# Altium PCB Main Circuit PCB.PcbDoc
Units mil, origin at the board's own origin, x right, y up, seen from the top; angles counter-clockwise.
Board outline 2933.07 x 1692.91 mil, 2 copper layers (Top Layer, Bottom Layer); 31 components, 24 nets, 105 pads, 21 vias.
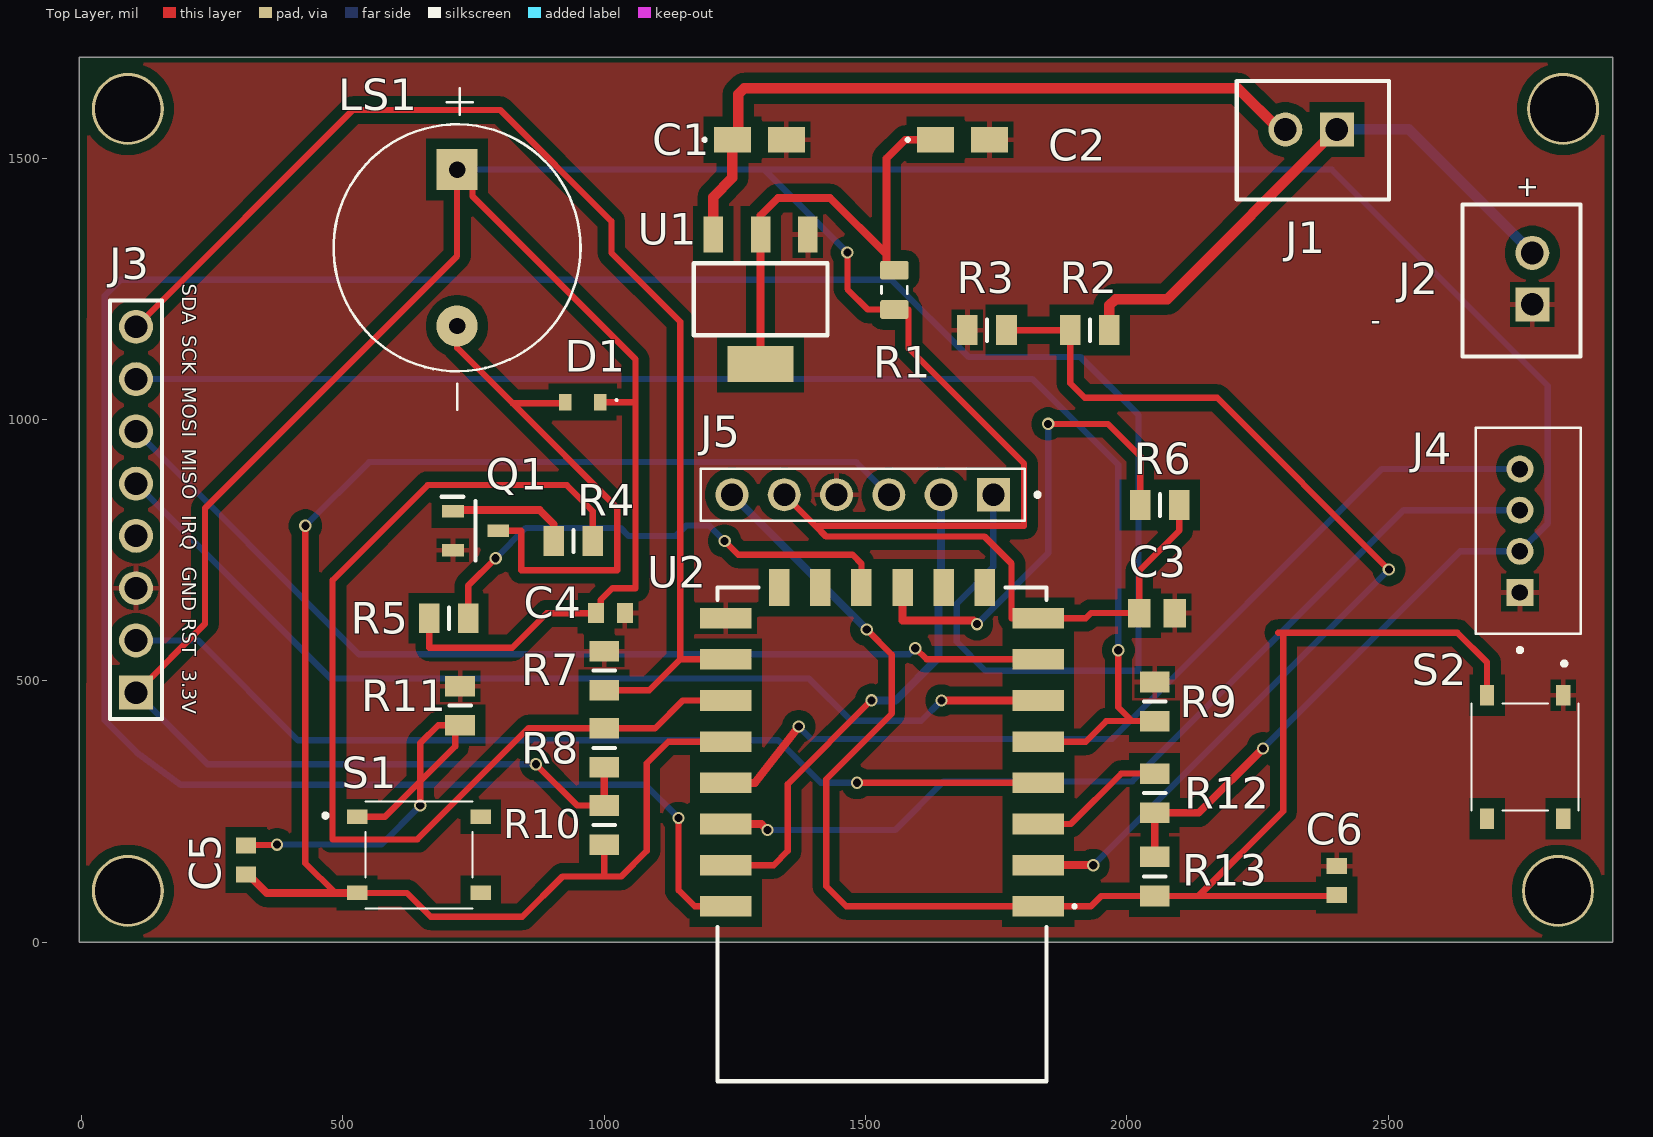
[diagram p0: Top Layer view]
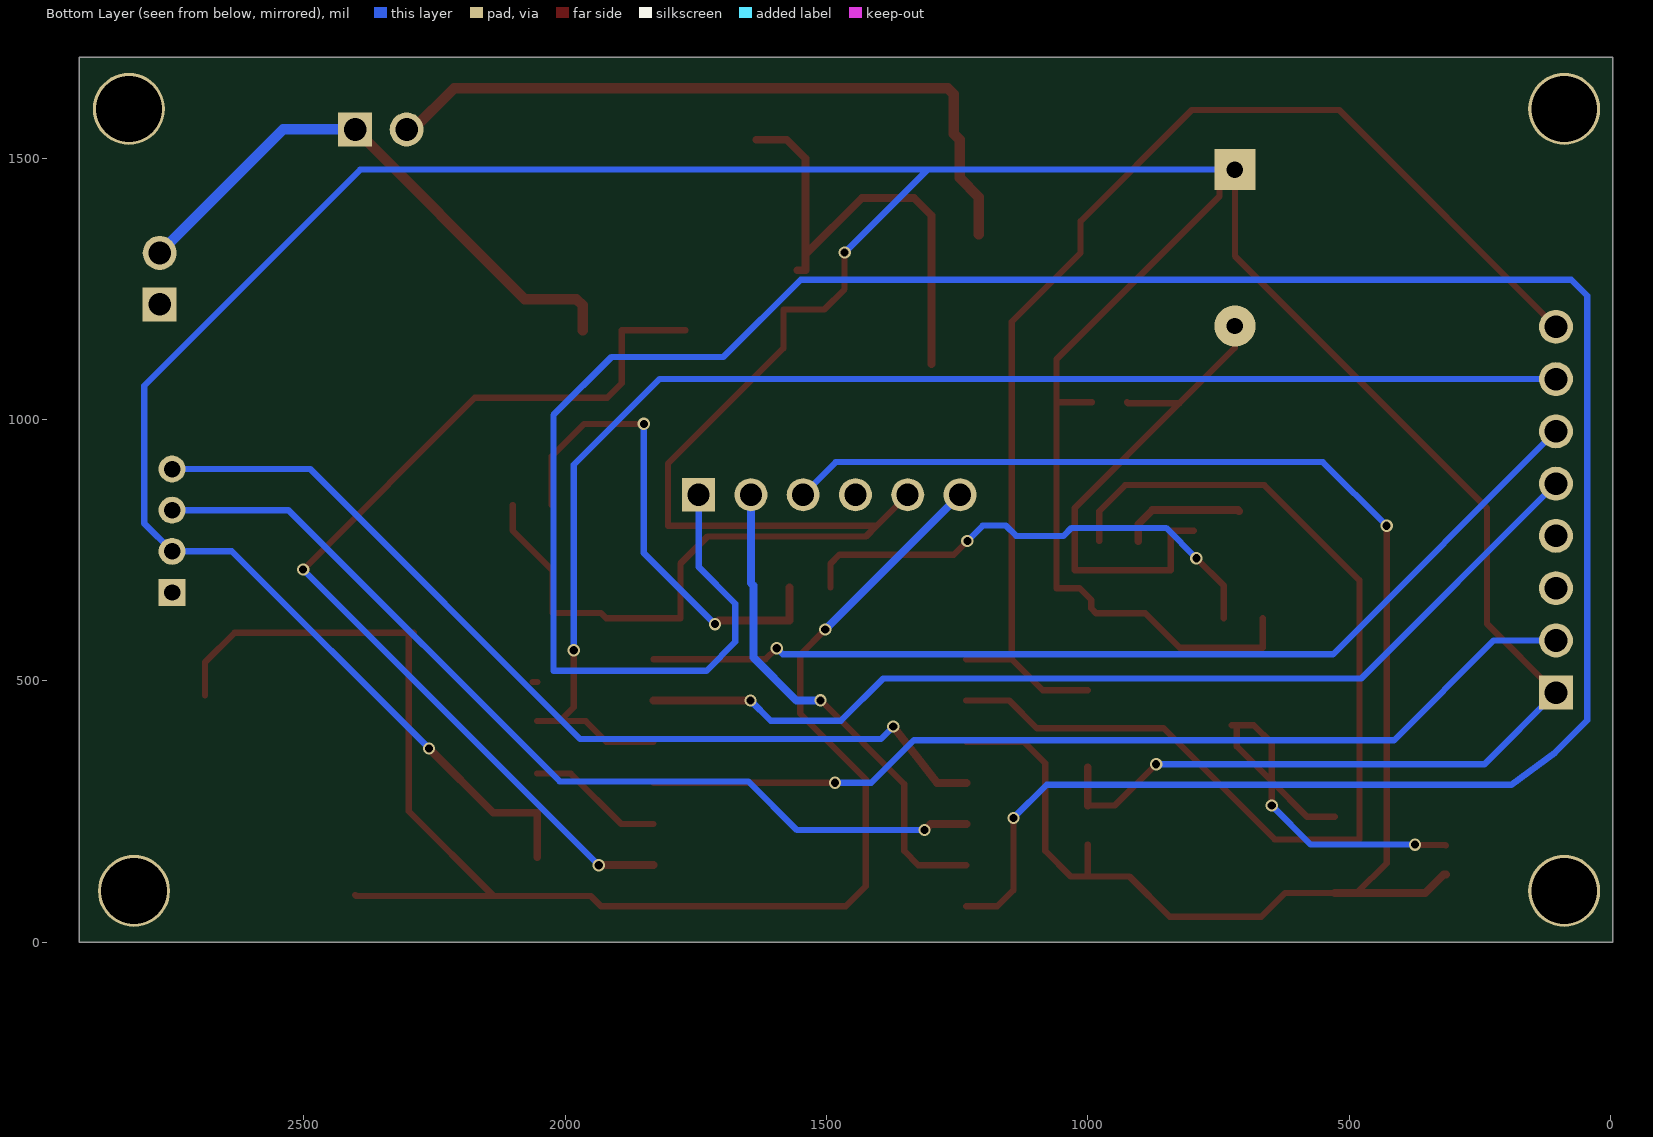
[diagram p1: Bottom Layer view, seen from below]
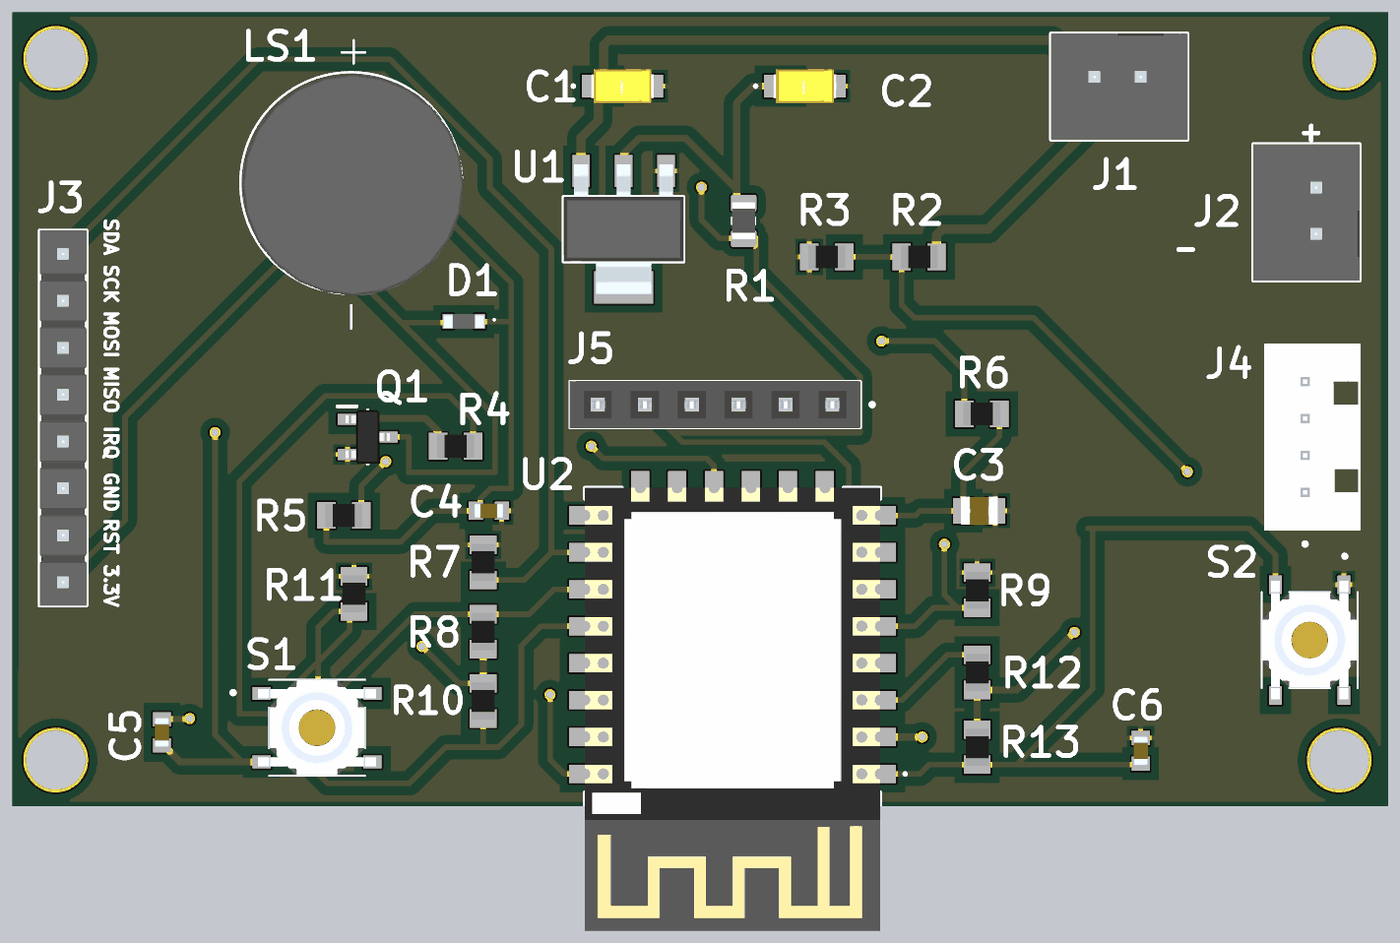
[diagram p2: 3D render of the assembled board from above, using the file's embedded part models]

## Layer stack, top to bottom
Top Solder: solder mask 0.4, Solder Resist, Dk 3.5
Top Layer: signal copper 1.4
Dielectric 1: dielectric 12.6, FR-4, Dk 4.8
Bottom Layer: signal copper 1.4
Bottom Solder: solder mask 0.4, Solder Resist, Dk 3.5

## Board outline
-3.94,1692.91 2929.13,1692.91 2929.13,0 -3.94,0

## Design rules (kind name [scope] priority, off if disabled: settings)
Clearance [All] p1: gap=19.68 ignorepadtopadclearanceinfootprint=FALSE except(12.69: SMDPad-SMDPad)
HoleSize [All] p1: absolutevalues=TRUE maxlimit=150 minlimit=1 maxpercent=80.000 minpercent=20.000
PolygonConnect [All] p1: connectstyle=Relief reliefconductorwidth=10 reliefentries=4 polygonreliefangle="90 Angle" airgapwidth=10
RoutingVias [All] p1: holewidth=15.75 width=23.62 viastyle="Through Hole" minholewidth=15.75 minwidth=23.62 maxholewidth=28 maxwidth=50
SolderMaskExpansion [All] p1: expansion=4 istentingtop=FALSE
Width [All] p1: maxlimit=30 minlimit=12 preferedwidth=15
29 further rules are at their usual default settings.

## Classes and differential pairs
component class Sheet1: C3 C4 C5 C6 D1 J1 J2 J3 J4 J5 LS1 Q1 R1 R2 R3 R4 R5 R6 R7 R8 R9 R10 R11 R12 R13 S1 S2 U1 U2

## Components (designator, comment, footprint, x,y, rotation, side; value= is the part's Value field where it differs from the comment)
C1 "10uF" T491A 1296.85,1535.43 r0 top
C2 "10uF" T491A 1685.43,1535.43 r0 top
C3 "10uF" 10UCER 2057.6,629.92 r0 top
C4 "0.1uF" 100n 1011.81,629.92 r180 top
C5 "0.1uF" 100n 314.96,157.48 r270 top
C6 "0.1uF" 100n 2401.57,118.11 r270 top
D1 "RB501SM0" Shottkey 958.66,1033.46 r270 top
J1 "POWER_SWITCH" 2jst 2401.57,1555.12 r180 top
J2 "BMS_IN" 2jst 2775.59,1220.47 r90 top
J3 "RFID_IN" 8x1 104.33,477.56 r90 top
J4 "OLED_OUT" 4x1 2751.97,787.4 r90 top
J5 "FLASH_IN" 6x1 1494.49,856.3 r180 top
LS1 "CMI-1295-0585T" BUZZER 718.5,1328.74 r270 top
Q1 "BC848B,215" BC8488 753.94,787.4 r0 top
R1 "0R" 0ohm 1555.12,1248.23 r270 top
R2 "100k" 100k 1929.13,1171.26 r0 top
R3 "100k" 100k 1732.28,1171.26 r0 top
R4 "330R" 330r 940.94,767.72 r0 top
R5 "10K" 10k 702.76,620.08 r0 top
R6 "10K" 10k 2062.99,836.61 r180 top
R7 "10K" 10k 1000,519.68 r270 top
R8 "10K" 10k 1000,372.05 r90 top
R9 "10K" 10k 2053.15,460.63 r270 top
R10 "10K" 10k 1000,224.41 r270 top
R11 "330R" 330r 724.41,452.76 r90 top
R12 "10K" 10k 2053.15,285.43 r90 top
R13 "10K" 10k 2053.15,125.98 r270 top
S1 "PTS526" SWITCH 645.67,167.32 r0 top
S2 "PTS526" SWITCH 2761.81,354.33 r270 top
U1 "TC1262-3.3VDBTR" 3v3 1299.21,1230.32 r270 top
U2 "ESP-12F" esp12f 1531.5,206.69 r180 top

## Footprints (in the part's own frame and the unit in brackets; to place one, negate y for a bottom-side part, rotate by r counter-clockwise, add the part's x,y. Pads: shape width x height; smd on the part's side, far side on the other; paste and mask are expansions set on the pad)
0ohm [mm]
  rrect25% 0.92x1.38 smd: 1(-0.955,0) 2(0.955,0)
  silkscreen extent -0.17,-0.63 0.18,0.62, body extent -1,-0.63 1,0.63, height 0.3
2jst [mm]
  rect 1.65x1.65 hole 1.1: 1(0,0)
  round 1.65 hole 1.1: 2(2.5,0)
  silkscreen extent -2.54,-2.35 4.86,3.4, body extent -2.54,-2.35 4.86,3.4, height 7
3v3 [mm]
  rect 1.75x0.95 smd: 1(-3.15,2.3) 2(-3.15,0) 3(-3.15,-2.3)
  rect 1.75x3.2 smd: 4(3.15,0)
  silkscreen extent -1.75,-3.25 1.75,3.25, body extent -3.5,-3.25 3.5,3.25, height 1.8
4x1 [mm]
  rect 1.308x1.308 hole 0.8: 1(-3,0)
  round 1.308 hole 0.8: 2(-1,0) 3(1,0) 4(3,0)
  silkscreen extent -5.9,-2.95 5,2.15, body extent -5,-2.95 5,2.15, height 9.1
6x1 [mm]
  rect 1.605x1.605 / inner round 1.605 / far side rect 1.605x1.605 hole 1.07: 1(-6.35,0)
  round 1.605 hole 1.07: 2(-3.81,0) 3(-1.27,0) 4(1.27,0) 5(3.81,0) 6(6.35,0)
  silkscreen extent -8.6,-1.27 7.87,1.27, body extent -7.87,-1.27 7.87,1.27, height 8.51
8x1 [mm]
  rect 1.65x1.65 hole 1.1: 1(0,0)
  round 1.65 hole 1.1: 2(2.54,0) 3(5.08,0) 4(7.62,0) 5(10.16,0) 6(12.7,0) 7(15.24,0) 8(17.78,0)
  silkscreen extent -1.27,-1.27 19.05,1.27, body extent -1.27,-1.27 19.05,1.27, height 8.54
10k [mm]
  rect 1x1.45 smd: 1(-0.95,0) 2(0.95,0)
  silkscreen extent 0,-0.53 0,0.52, body extent -1,-0.63 1,0.63, height 0.5
10UCER [mm]
  rect 1.1x1.38 smd: 1(-0.863,0) 2(0.863,0)
  body extent -1,-0.76 1,0.76, height 1.22
100k [mm]
  rect 1x1.45 smd: 1(-0.95,0) 2(0.95,0)
  silkscreen extent 0,-0.53 0,0.53, body extent -1,-0.63 1,0.63, height 0.5
100n [mm]
  rect 0.78x0.98 smd: 1(-0.7,0) 2(0.7,0)
  body extent -0.8,-0.4 0.8,0.4, height 0.95
330r [mm]
  rect 1x1.45 smd: 1(-0.95,0) 2(0.95,0)
  silkscreen extent 0,-0.53 0,0.52, body extent -1,-0.63 1,0.63, height 0.5
BC8488 [mm]
  rect 1.05x0.6 smd: 1(-1.1,0.95) 2(-1.1,-0.95) 3(1.1,0)
  silkscreen extent -1.65,-1.45 0,1.65, body extent -1.2,-1.45 1.2,1.45, height 0.95
BUZZER [mm]
  round 2 hole 0.8: N(3.8,0)
  rect 2x2 / inner round 2 / far side rect 2x2 hole 0.8: P(-3.8,0)
  silkscreen extent -7.75,-6 7.87,6, body extent -5.9,-5.9 6.1,6.08, height 10.2
esp12f [mm]
  rect 2.5x1 smd: 1(-7.6,3.5) 2(-7.6,1.5) 3(-7.6,-0.5) 4(-7.6,-2.5) 5(-7.6,-4.5) 6(-7.6,-6.5) 7(-7.6,-8.5) 8(-7.6,-10.5) 15(7.6,-10.5) 16(7.6,-8.5) 17(7.6,-6.5) 18(7.6,-4.5) 19(7.6,-2.5) 20(7.6,-0.5) 21(7.6,1.5) 22(7.6,3.5)
  rect 1x1.8 smd: 9(-5,-12) 10(-3,-12) 11(-1,-12) 12(1,-12) 13(3,-12) 14(5,-12)
  silkscreen extent -9.4,-12 8,12, body extent -8,-12 8,12, height 3.1
Shottkey [mm]
  rect 0.8x0.6 smd: 1(0,0.85) 2(0,-0.85)
  silkscreen extent -0.15,1.6 -0.05,1.7, body extent -0.4,-1.09 0.4,1.09, height 0.8
SWITCH [mm]
  rect 1x0.7 smd: 1(-3,1.85) 2(3,1.85) 3(-3,-1.85) 4(3,-1.85)
  silkscreen extent -4.64,-2.6 2.6,2.6, body extent -3.2,-2.6 3.2,2.6, height 1.55
T491A [mm]
  rect 1.8x1.23 smd: 1(-1.31,0) 2(1.31,0)
  silkscreen extent -2.71,-0.05 -2.61,0.05, body extent -1.7,-0.9 1.7,0.9, height 1.81

## Part data
C1 C2: library part T491A106K010AT, "Capacitor Polarised", Manufacturer_Name=KEMET, Mouser Part Number=80-T491A106K010, Arrow Part Number=T491A106K010AT, Arrow Price/Stock=https://www.arrow.com/en/products/t491a106k010at/kemet-corporation?region=nac, Datasheet Link=https://content.kemet.com/datasheets/KEM_T2005_T491.pdf, Height=1.8mm, Manufacturer_Part_Number=T491A106K010AT, Mouser Price/Stock=https://www.mouser.co.uk/ProductDetail/KEMET/T491A106K010AT?qs=VCf6WUQjPgE2CESwzh%252BRVg%3D%3D
C3: "10ÂµF Â±10% 10V Ceramic Capacitor X5R 0805 (2012 Metric)", Package="0805 Samsung", Arrow_Electronics-Purchase-URL=https://snapeda.com/shop?store=Arrow+Electronics&id=3598324, Digi-Key_Part_Number=1276-6456-1-ND, DigiKey-Purchase-URL=https://snapeda.com/shop?store=DigiKey&id=3598324, MF="Samsung Electro-Mechanics", Mouser-Purchase-URL=https://snapeda.com/shop?store=Mouser&id=3598324, MP=CL21A106KPFNNNG, SnapEDA_Link=https://www.snapeda.com/parts/CL21A106KPFNNNG/Samsung%20Electro-Mechanics/view-part/3598324/?ref=snap
C4 C5 C6: "Capacitor", Manufacturer_Name=KEMET, Manufacturer_Part_Number=C0603C104K1RACTU, Mouser Part Number=80-C0603C104K1RACTU, Datasheet Link=https://search.kemet.com/component-documentation/download/specsheet/C0603C104K1RACTU, Height=0.95mm, Mouser Price/Stock=https://www.mouser.co.uk/ProductDetail/KEMET/C0603C104K1RACTU?qs=ulEaXIWI0c%252BGZAOcX%252BBs5A%3D%3D
D1: library part RB501SM-30, "Schottky Diode", Manufacturer_Name="ROHM Semiconductor", Mouser Part Number=N/A, Datasheet Link=https://www.rohm.com/products/diodes/schottky-barrier-diodes/ultra-low-vf/rb501sm-30-product, Height=0.7mm, Manufacturer_Part_Number=RB501SM-30, Mouser Price/Stock=https://www.mouser.co.uk/ProductDetail/ROHM-Semiconductor/RB501SM-30?qs=tlR8i4ZVbUc9OuTORAzjPQ%3D%3D
J1 J2: library part B2B-XHALFSN_, "Connector", Arrow Part Number=B2B-XH-A(LF)(SN), Manufacturer_Name="JST (JAPAN SOLDERLESS TERMINALS)", Arrow Price/Stock=https://www.arrow.com/en/products/b2b-xh-a-lf-sn/jst-manufacturing?region=europe, Datasheet Link=http://www.jst-mfg.com/product/pdf/eng/eXH.pdf, Height=7mm, Manufacturer_Part_Number=B2B-XH-A(LF)(SN)
J3: library part 61300811121, "Connector", Manufacturer_Name="Wurth Elektronik", Mouser Part Number=710-61300811121, Datasheet Link=http://katalog.we-online.de/em/datasheet/6130xx11121.pdf, Height=8.54mm, Manufacturer_Part_Number=61300811121, Mouser Price/Stock=https://www.mouser.co.uk/ProductDetail/Wurth-Elektronik/61300811121?qs=PhR8RmCirEZRdx%252BVlEmRRA%3D%3D
J4: library part 4x1, "GROVE 2MM 4PIN VERT CONN 10PCS", Package=None, Arrow_Electronics-Purchase-URL=https://snapeda.com/shop?store=Arrow+Electronics&id=583576, Availability=Good, MF="Seeed Technology", Mouser-Purchase-URL=https://snapeda.com/shop?store=Mouser&id=583576, MP=110990030, Price=None, SnapEDA_Link=https://www.snapeda.com/parts/110990030/Seeed%20Technology%20Co.,%20Ltd/view-part/583576/?ref=snap
J5: library part PPTC061LFBN-RC, "6 Position Header Connector 0.100 (2.54mm) Through Hole Tin", Package=None, Check_prices=https://www.snapeda.com/parts/PPTC061LFBN-RC/Sullins+Connector+Solutions/view-part/?ref=eda, MF="Sullins Connector", MP=PPTC061LFBN-RC, SnapEDA_Link=https://www.snapeda.com/parts/PPTC061LFBN-RC/Sullins+Connector+Solutions/view-part/?ref=snap
LS1: "12 mm, 5 Vdc, 85 dB, Through Hole, Driving Circuit, Magnetic Audio Indicator Buzzer", Package="CUI Inc.", Availability="In Stock", Check_prices=https://www.snapeda.com/parts/CMI-1295-0585T/CUI+Devices/view-part/?ref=eda, CUI_purchase_URL=https://www.cuidevices.com/product/audio/buzzers/audio-indicators/cmi-1295-0585t?utm_source=snapeda.com&utm_medium=referral&utm_campaign=snapedaBOM, MF="CUI Devices", MP=CMI-1295-0585T, Price=None, Purchase-URL=https://pricing.snapeda.com/search/part/CMI-1295-0585T/?ref=eda, SnapEDA_Link=https://www.snapeda.com/parts/CMI-1295-0585T/CUI+Devices/view-part/?ref=snap
Q1: "Transistor BJT NPN", Manufacturer_Name=Nexperia, Mouser Part Number=771-BC848B215, Arrow Part Number=BC848B,215, Arrow Price/Stock=https://www.arrow.com/en/products/bc848b215/nexperia?region=nac, Datasheet Link=https://assets.nexperia.com/documents/data-sheet/BC848_SER.pdf, Height=1.1mm, Manufacturer_Part_Number=BC848B,215, Mouser Price/Stock=https://www.mouser.co.uk/ProductDetail/Nexperia/BC848B215?qs=me8TqzrmIYWVIx0akKpYzQ%3D%3D
R1: library part RC0805JR-070RL, "0 Ohms Jumper 0.125W, 1/8W Chip Resistor 0805 (2012 Metric) Moisture Resistant Thick Film", Package="0805 Yageo", Check_prices=https://www.snapeda.com/parts/RC0805JR-070RL/Yageo/view-part/?ref=eda, MF=Yageo, MP=RC0805JR-070RL, SnapEDA_Link=https://www.snapeda.com/parts/RC0805JR-070RL/Yageo/view-part/?ref=snap
R2 R3: "Resistor", Arrow Part Number=CR0805-FX-1002ELF, Manufacturer_Name=Bourns, Mouser Part Number=652-CR0805FX-1002ELF, Arrow Price/Stock=https://www.arrow.com/en/products/cr0805-fx-1002elf/bourns?region=nac, Datasheet Link=https://www.bourns.com/pdfs/chpreztr.pdf, Height=0.6mm, Manufacturer_Part_Number=CR0805-FX-1002ELF, Mouser Price/Stock=https://www.mouser.co.uk/ProductDetail/Bourns/CR0805-FX-1002ELF?qs=tknLyCMIRbPr%252BDD0s0nG9g%3D%3D
R4 R11: library part CR0805-FX-3300ELF, "Resistor", Manufacturer_Name=Bourns, Mouser Part Number=652-CR0805FX-3300ELF, Arrow Part Number=CR0805-FX-3300ELF, Arrow Price/Stock=https://www.arrow.com/en/products/cr0805-fx-3300elf/bourns?region=nac, Datasheet Link=https://www.bourns.com/pdfs/chpreztr.pdf, Height=0.6mm, Manufacturer_Part_Number=CR0805-FX-3300ELF, Mouser Price/Stock=https://www.mouser.co.uk/ProductDetail/Bourns/CR0805-FX-3300ELF?qs=4vGXhLEMbUz19Gzwl%252BfkPA%3D%3D
R5 R6 R7 R8 R9 R10 R12 R13: library part 10k, "Resistor", Arrow Part Number=CR0805-FX-1002ELF, Manufacturer_Name=Bourns, Mouser Part Number=652-CR0805FX-1002ELF, Arrow Price/Stock=https://www.arrow.com/en/products/cr0805-fx-1002elf/bourns?region=nac, Datasheet Link=https://www.bourns.com/pdfs/chpreztr.pdf, Height=0.6mm, Manufacturer_Part_Number=CR0805-FX-1002ELF, Mouser Price/Stock=https://www.mouser.co.uk/ProductDetail/Bourns/CR0805-FX-1002ELF?qs=tknLyCMIRbPr%252BDD0s0nG9g%3D%3D
S1 S2: library part PTS526-SK15-SMTR2-LFS, "Switch", Arrow Part Number="PTS526 SK15 SMTR2 LFS", Manufacturer_Name="C & K COMPONENTS", Mouser Part Number=611-PTS526SK15SMR2L, Arrow Price/Stock=https://www.arrow.com/en/products/pts526-sk15-smtr2-lfs/ck?region=nac, Datasheet Link=https://www.ckswitches.com/media/2780/pts526.pdf, Height=1.65mm, Manufacturer_Part_Number="PTS526 SK15 SMTR2 LFS", Mouser Price/Stock=https://www.mouser.co.uk/ProductDetail/CK/PTS526-SK15-SMTR2-LFS?qs=UXgszm6BlbF5Ezp94JAQtw%3D%3D
U1: library part LM1117-3.3MDCNOPB, "Integrated Circuit", Manufacturer_Name="Texas Instruments", Manufacturer_Part_Number="LM1117-3.3 MDC/NOPB", Mouser Part Number=N/A, Datasheet Link=http://www.ti.com/lit/ds/symlink/lm1117.pdf?HQS=TI-null-null-mousermode-df-pf-null-wwe&DCM=yes&ref_url=https%3A%2F%2Fwww.mouser.in%2F&distId=26, Height=1.8mm, Mouser Price/Stock=https://www.mouser.co.uk/ProductDetail/Texas-Instruments/LM1117-3.3-MDC-NOPB?qs=Ek1QeT%2FBOW0pQDUjkXKTEQ%3D%3D
U2: "Integrated Circuit", Manufacturer_Name=Ai-Thinker, Manufacturer_Part_Number=esp-12f, Datasheet Link=https://docs.ai-thinker.com/_media/esp8266/docs/esp-12f_product_specification_en.pdf, Height=3.1mm

## Free pads (board coordinates)
  round 137.8 hole 125.98: ""(88.58,98.43) ""(88.58,1594.49) ""(2824.8,98.43) ""(2834.65,1594.49)

## Via types
v1: diameter 23.62, hole 15.75, Top Layer to Bottom Layer, 21 vias

## Nets (pads, with @x,y where several pads share a name; then routed paths per layer and width w, separated by ;. In a path a pad name is that pad's centre, name@x,y a point inside that pad or via, vN(x,y) a via of type N, cw(c..) or ccw(c..) an arc to the next point about the centre after c; other vN are vias at no path point)
3.7V: C1.1 J1.2 U1.3 | length 1371.7
  Top Layer w20: U1.3 1208.66,1425.8 1245.28,1462.42 C1.1 1256.5,1546.65 1256.5,1622.14 1268.21,1633.86 2212.24,1633.86 2290.98,1555.12 J1.2
+3.3V: C3.1 C4.2 D1.1 J3.1 J4.2 J5.5 LS1.P R1.2 R5.1 R6.1 R8.1 R10.1 R12.1 R13.1 U2.8 | length 9820.5
  Top Layer w12: J3.1 236.28,609.51 236.28,830.8 718.5,1313.02 LS1.P@718.5,1456.69 ; R5.1 665.35,563.8 824.28,563.8 890.28,629.8 984.13,629.8 C4.2 993.61,639.28 993.61,655.13 1015.78,677.3 1059.9,677.3 1059.9,1033.46 ; LS1.P LS1.P@718.5,1456.69 ; v1(869.29,340.8) 948.28,261.81 R10.1 ; D1.1 1059.9,1033.46 ; J5.5 1403.98,796.8 ; v1(1465.28,1319.8) 1465.28,1249.8 1504.46,1210.63 R1.2 1582.28,1210.63 1582.28,1136.8 1803.28,915.8 1803.28,796.8 1403.98,796.8 ; R6.1 2100.4,787.8 2023.62,711.03 C3.1 1931.13,629.92 1921.28,620.08 U2.8 1779.28,620.08 1779.28,724.8 1727.65,776.44 1424.35,776.44 1403.98,796.8 ; LS1.P@718.5,1456.69 737.74,1456.69 747.96,1446.48 747.96,1427.24 1059.9,1115.29 1059.9,1033.46
  Top Layer w15: R10.1 R8.1 ; R13.1 R12.1 2137.51,248.03 v1(2260.28,370.8)
  Bottom Layer w12: J3.1 241.09,340.8 v1(869.29,340.8) ; LS1.P 1306.74,1478.35 ; v1(1465.28,1319.8) 1306.74,1478.35 ; v1(2260.28,370.8) 2637.51,748.03 J4.2 2805.28,801.35 2805.28,1064.8 2391.74,1478.35 1306.74,1478.35
ADC: R2.1 R3.2 U2.2 | length 1885.9
  Top Layer w12: R3.2 R2.1 1891.73,1069.36 1919.28,1041.8 2172.62,1041.8 v1(2501.28,713.14)
  Top Layer w15: U2.2 v1(1935.78,147.64)
  Bottom Layer w12: v1(1935.78,147.64) v1(2501.28,713.14)
BATTERY: J1.1 J2.2 R2.2 | length 1093.6
  Top Layer w20: R2.2 1966.54,1218.6 1978.25,1230.32 2076.77,1230.32 J1.1
  Bottom Layer w20: J1.1 2539.37,1555.12 J2.2
EN: R12.2 U2.3 | length 262.4
  Top Layer w12: U2.3 1892.83,226.38 1989.28,322.83 R12.2
GND: C1.2 C2.2 C3.2 C4.1 C6.1 J2.1 J3.3 J4.1 J5.4 Q1.2 R3.1 R7.1 R9.1 R11.2 S2.1 U1.1 U2.15 | length 8.9
  Top Layer w12: R9.1 R9.1@2062.01,498.03
GPIO0: C5.2 J5.3 R10.2 S1.3 U2.18 | length 3167.7
  Top Layer w12: v1(428.28,796.8) 428.28,151.49 485.28,94.49 ; S1.3 622.6,94.49 668.28,48.8 843.1,48.8 920.28,125.98 1000,125.98 ; R10.2 1000,125.98 ; U2.18 1122.28,383.86 1081.28,342.86 1081.28,174.8 1032.46,125.98 1000,125.98
  Top Layer w15: C5.2 318.9,129.92 354.33,94.49 485.28,94.49 S1.3
  Bottom Layer w12: v1(428.28,796.8) 550.28,918.8 1481.98,918.8 J5.3
GPIO2: R4.2 R8.2 U2.17 | length 2009.3
  Top Layer w12: R4.2 978.35,824.8 928.35,874.8 662.28,874.8 480.28,692.8 480.28,196.8 642.39,196.8 855.04,409.45 R8.2 1097.35,409.45 1150.5,462.6 U2.17
GPIO4: J4.4 U2.19 | length 1796.2
  Top Layer w15: U2.19 1288.28,305.12 v1(1372.28,412.8)
  Bottom Layer w12: v1(1372.28,412.8) 1396.28,388.8 1970.97,388.8 2487.67,905.51 J4.4
GPIO5: J4.3 U2.20 | length 1778
  Top Layer w15: U2.20 1300.71,226.38 v1(1312.28,214.8)
  Bottom Layer w12: v1(1312.28,214.8) 1556.28,214.8 1649.28,307.8 2010.28,307.8 2529.25,826.77 J4.3
GPIO9: R6.2 U2.11 | length 943.2
  Top Layer w12: v1(1849.28,991.8) 1963.59,991.8 2025.59,929.8 R6.2
  Top Layer w15: U2.11 1570.87,615.8 1706.28,615.8 v1(1713.28,608.8)
  Bottom Layer w12: v1(1713.28,608.8) 1849.28,744.8 v1(1849.28,991.8)
GPIO10: R5.2 U2.12 | length 950.3
  Top Layer w12: R5.2 740.16,682.68 v1(792.28,734.8) ; v1(1230.32,767.72) 1256.28,741.75 1475.18,741.75 1492.13,724.8 U2.12
  Bottom Layer w12: v1(792.28,734.8) 850.28,792.8 1031.1,792.8 1046.35,777.56 1136.76,777.56 1156.44,797.24 1200.79,797.24 v1(1230.32,767.72)
GPIO12: J3.5 U2.6 | length 1930.4
  Top Layer w15: v1(1645.28,462.6) U2.6
  Bottom Layer w12: J3.5 477.09,504.8 1391.3,504.8 1472.29,423.81 1606.49,423.81 v1(1645.28,462.6)
GPIO13: J3.6 U2.7 | length 1916.7
  Top Layer w12: v1(1595.28,562.8) 1616.75,541.34 U2.7
  Bottom Layer w12: J3.6 530.72,551.17 1583.65,551.17 v1(1595.28,562.8)
GPIO14: J3.7 R9.2 U2.5 | length 2687.1
  Top Layer w12: U2.5 1921.28,383.86 1960.65,423.23 2009.86,423.23 ; v1(1983.28,558.8) 1983.28,449.8 2009.86,423.23 ; R9.2 2009.86,423.23
  Bottom Layer w12: J3.7 1819.53,1077.56 1983.28,913.8 v1(1983.28,558.8)
GPIO15: J3.8 R7.2 U2.16 | length 2318.8
  Top Layer w12: J3.8 519.08,1592.3 800.93,1592.3 1013.78,1379.45 1013.78,1318.9 1145.28,1187.39 1145.28,541.28 ; R7.2 1086.28,482.28 1145.28,541.28 ; U2.16 1145.34,541.34 1145.28,541.28
GPIO16: J3.2 U2.4 | length 1839.2
  Top Layer w12: v1(1483.75,305.12) U2.4
  Bottom Layer w12: J3.2 223.28,577.56 414.04,386.8 1332.6,386.8 1414.28,305.12 v1(1483.75,305.12)
NetC2_1: C2.1 R1.1 U1.2 U1.4 | length 921.1
  Top Layer w15: U1.4 U1.2 1299.21,1390.73 1332.28,1423.8 1432.28,1423.8 1540.28,1315.8 ; R1.1 1540.28,1285.83 1540.28,1315.8 ; C2.1 1575.91,1535.43 1540.28,1499.8 1540.28,1315.8
NetC5_1: C5.1 R11.1 S1.1 | length 858.9
  Top Layer w12: C5.1 315.94,186.02 373.03,186.02 v1(374.02,187.01) ; S1.1 580.64,240.16 648.28,307.8 ; v1(648.28,261.8) 648.28,307.8 ; R11.1 R11.1@715.28,415.35 ; 648.28,307.8 648.28,381.35 682.28,415.35 R11.1@715.28,415.35 ; 648.28,307.8 715.28,374.8 R11.1@715.28,415.35
  Bottom Layer w12: v1(374.02,187.01) 573.49,187.01 v1(648.28,261.8)
NetD1_2: D1.2 LS1.N Q1.3 | length 998.9
  Top Layer w12: LS1.N 718.5,1137.58 824.7,1031.39 ; Q1.3 841.28,787.4 841.28,711.99 1025.22,711.99 1025.22,830.87 824.7,1031.39 ; D1.2 923.12,1031.39 824.7,1031.39
NetQ1_1: Q1.1 R4.1 | length 237
  Top Layer w15: Q1.1 712.63,826.8 876.54,826.8 903.54,799.8 R4.1
RST: C6.2 J5.6 R13.2 S2.3 U2.1 | length 2986.9
  Top Layer w12: v1(1502.28,598.5) 1550.28,550.5 1550.28,437.64 1424.76,312.12 1424.76,107.33 1463.19,68.9 U2.1 1931.28,68.9 1950.97,88.58 R13.2 2137.06,88.58 ; 2289.37,592.52 2299.28,592.52 ; C6.2 2399.6,88.58 2137.06,88.58 ; S2.3 2688.98,535.83 2632.28,592.52 2299.28,592.52 ; 2137.06,88.58 2299.28,250.8 2299.28,592.52
  Bottom Layer w15: J5.6 v1(1502.28,598.5)
RX: J5.2 U2.21 | length 960.3
  Top Layer w12: U2.21 1324.12,147.64 1351.28,174.8 1351.28,302.8 v1(1511.28,462.8)
  Bottom Layer w15: v1(1511.28,462.8) 1557.49,462.8 1639.6,544.92 1639.6,682.49 1644.49,687.37 J5.2
TX: J5.1 U2.22 | length 5491.5
  Top Layer w12: v1(1142.28,237.8) 1142.28,99.8 1173.19,68.9 U2.22
  Bottom Layer w12: v1(1142.28,237.8) 1078.66,301.43 189.66,301.43 106.28,362.8 44.28,424.8 44.28,1236.8 75.28,1267.8 1549.28,1267.8 1697.28,1119.8 1911.28,1119.8 2022.28,1008.8 2022.28,519.8 1729.29,519.8 1674.29,574.8 1674.29,647.8 1744.49,718 J5.1
pads on no net: J3.4 S1.2 S1.4 S2.2 S2.4 U2.9 U2.10 U2.13 U2.14

## Polygon pours and split planes (outlines as drawn)
GND on Top Layer "NONET_L-01_P-001" (solid, pour order 0): 10.88,1683.07 2913.39,1683.07 2913.39,49.21 2874.02,9.84 8.81,9.84

## Silkscreen, mask and mechanical layers (free items; w line width, h text height)
Top Overlay:
  text "+" at 2749.5,1466.38 h39.37 r270
  text "SDA" at 193.07,1259.69 h27.56 r270
  text "-" at 2466.69,1171.42 h39.37
  text "SCK" at 193.07,1161.26 h27.56 r270
  text "MOSI" at 193.07,1062.83 h27.56 r270
  text "MISO" at 193.07,944.72 h27.56 r270
  text "IRQ" at 193.07,816.77 h27.56 r270
  text "GND" at 193.07,718.35 h27.56 r270
  text "RST" at 193.07,619.92 h27.56 r270
  text "3.3V" at 193.07,521.5 h27.56 r270